# Allegro board sophum_esc_v3.brd
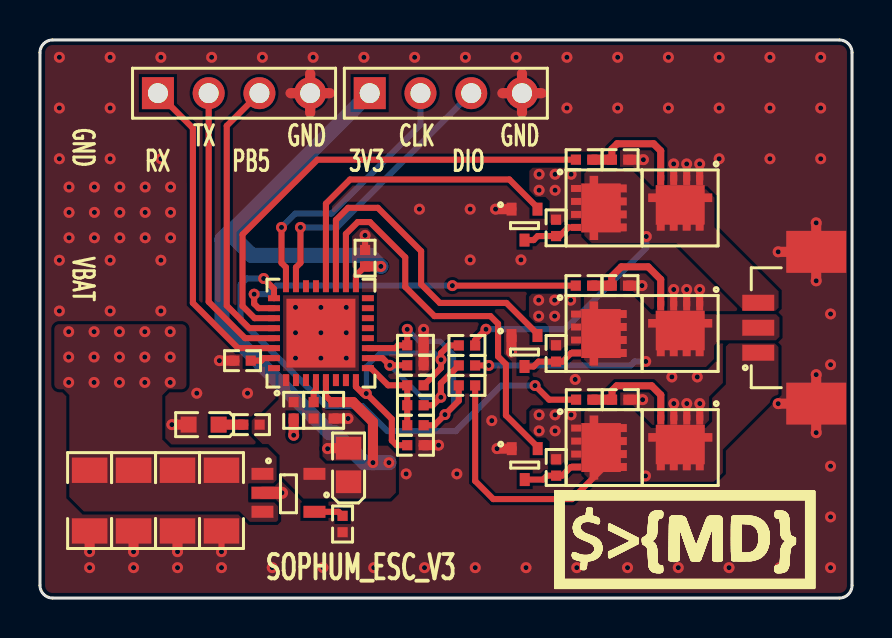
[diagram p0: board, top side]
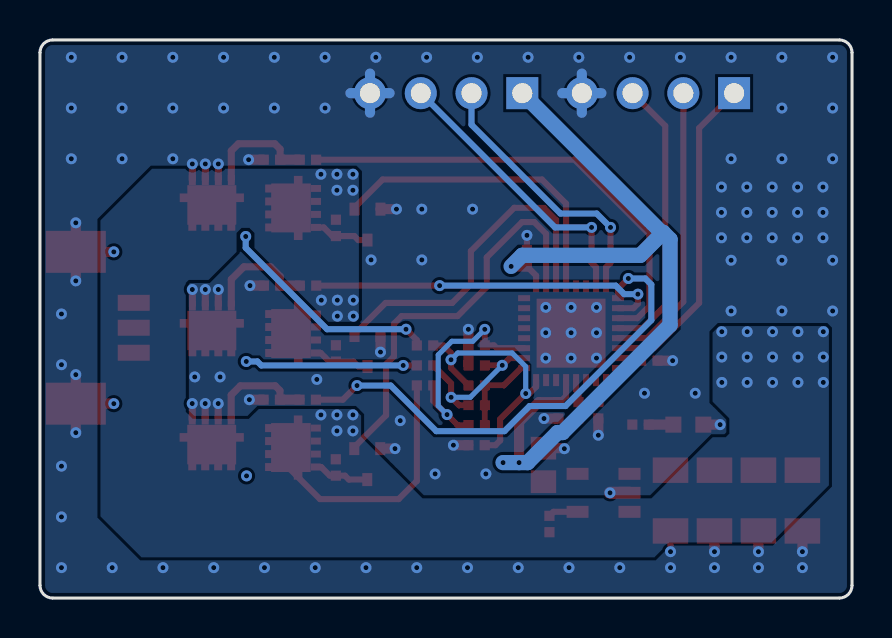
[diagram p1: board, bottom side, seen from below]

Outline 40.64 x 27.94 mm; copper layers: TOP, BOTTOM. Coordinates in mm from the lower left corner of the outline.
Outline path: 0,27.3 0,0.63 arc(0.19,0.19) 0.64,0 40,0 arc(40.45,0.19) 40.64,0.63 40.64,27.3 arc(40.45,27.75) 40,27.94 0.64,27.94 arc(0.19,27.75) 0,27.3

## Placement (name value [footprint] x y rotation side)
C1  47uF  [C1206]  4.68 4.88 270 top
C2  47uF  [C1206]  9.08 4.88 270 top
C3  47uF  [C1206]  2.48 4.88 270 top
C4  47uF  [C1206]  6.88 4.88 270 top
C5  1nF  [C0402]  15.14 3.71 270 top
C6  22uF  [TC0805]  15.44 6.66 90 top
C7  0.1uF  [C0402]  12.7 9.4 270 top
C8  0.1uF  [C0402]  14.7 9.4 270 top
C9  0.1uF  [C0402]  16.27 17.01 90 top
J1  COM  [HDR4X1-2R54-TM-VM]  5.9 25.28 0 top
J2  DEBUG  [HDR4X1-2R54-TM-VM]  16.5 25.28 0 top
J3  MOTOR_PLUG  [DBAR-3-1R25-SM]  37.4 13.53 90 top
LED1  RED  [LED0603]  8.19 8.68 180 top
Q1  AON7409  [DFN-3X3-5-0R50X0R35]  28.23 7.53 270 top
Q2  AON7409  [DFN-3X3-5-0R50X0R35]  28.23 13.24 270 top
Q3  AON7409  [DFN-3X3-5-0R50X0R35]  28.23 19.53 270 top
Q4  DTC143ZUAT106  [SOT-23-3-0R65X0R50]  24.26 6.71 180 top
Q5  DTC143ZUAT106  [SOT-23-3-0R65X0R50]  24.25 12.37 180 top
Q6  DTC143ZUAT106  [SOT-23-3-0R65X0R50]  24.25 18.69 180 top
Q7  AON7544  [DFN-3X3-5-0R50X0R35]  32.04 7.53 180 top
Q8  AON7544  [DFN-3X3-5-0R50X0R35]  32.04 13.24 180 top
Q9  AON7544  [DFN-3X3-5-0R50X0R35]  32.04 19.53 180 top
R1  10K  [R0402]  10.14 11.88 0 top
R2  1K  [R0402]  10.58 8.68 180 top
R3  10K  [R0402]  13.7 9.4 90 top
R4  2K  [R0402]  21.37 10.65 180 top
R5  2K  [R0402]  21.37 11.65 180 top
R6  2K  [R0402]  21.37 12.65 180 top
R7  1K  [R0402]  18.79 7.65 0 top
R8  1K  [R0402]  18.79 11.65 0 top
R9  1K  [R0402]  18.79 12.65 0 top
R10  10K  [R0402]  18.79 10.65 180 top
R11  10K  [R0402]  18.79 9.65 180 top
R12  10K  [R0402]  18.79 8.65 180 top
R13  75R  [R0402]  25.83 6.54 270 top
R14  75R  [R0402]  25.83 12.25 270 top
R15  75R  [R0402]  25.83 18.53 270 top
R16  75R  [R0402]  27.24 9.93 0 top
R17  75R  [R0402]  27.22 15.64 0 top
R18  75R  [R0402]  27.23 21.95 0 top
R19  10K  [R0402]  29.04 9.93 0 top
R20  10K  [R0402]  29.02 15.64 0 top
R21  10K  [R0402]  29.03 21.95 0 top
U1  AP2210K-3.3TRG1  [SOT-23-5-1R10X0R60]  12.44 5.27 0 top
U2  STM32F051K8U6  [UFQFPN-32-0R60X0R30]  14.06 13.26 90 top

## Library data of the parts
C1-C5 C7-C9 = CAPACITOR-NON-POL
C6 = CAPACITOR-POL
J1 J2 = HEADER-4X1
J3 = DBAR-3
LED1 = LED
Q1-Q3 = AON7409
Q4-Q6 = DTC143ZUAT106
Q7-Q9 = AON7544
R1-R21 = RESISTOR
U1 = AP2210K-3.3TRG1
U2 = STM32F051K8U6

## Footprints (pads in the part's own frame, mm; a bottom-side part is the same pattern mirrored in y, then rotated)
C0402
  rect 0.51x0.51 smd: 1(-0.41,0) 2(0.41,0)
C1206
  rect 1.27x1.78 smd: 1(-1.52,0) 2(1.52,0)
DBAR-3-1R25-SM
  rect 0.8x1.6 smd: 1(-1.25,1.45) 2(0,1.45) 3(1.25,1.45)
  rect 2.1x3 smd: 4(-3.8,-1.45) 5(3.8,-1.45)
DFN-3X3-5-0R50X0R35
  rect 0.35x0.5 smd: 1(-0.975,-1.4) 2(-0.325,-1.4) 3(0.325,-1.4) 4(0.975,-1.4)
  custom 3.21x2.28 smd: 5(0,0)
HDR4X1-2R54-TM-VM
  rect 1.6x1.6 hole 1: 1(0,0)
  round 1.6 hole 1: 2(2.54,0) 3(5.08,0) 4(7.62,0)
LED0603
  rect 0.8x0.8 smd: 1(-0.75,0) 2(0.75,0)
R0402
  rect 0.51x0.51 smd: 1(-0.41,0) 2(0.41,0)
SOT-23-3-0R65X0R50
  rect 0.5x0.65 smd: 1(0.65,-0.775) 2(-0.65,-0.775) 3(0,0.775)
SOT-23-5-1R10X0R60
  rect 1.1x0.6 smd: 1(-1.3,0.95) 2(-1.3,0) 3(-1.3,-0.95) 4(1.3,-0.95) 5(1.3,0.95)
TC0805
  rect 1.14x1.27 smd: 1(-0.84,0) 2(0.84,0)
UFQFPN-32-0R60X0R30
  rect 0.6x0.3 smd: 1(-2.35,1.75) 2(-2.35,1.25) 3(-2.35,0.75) 4(-2.35,0.25) 5(-2.35,-0.25) 6(-2.35,-0.75) 7(-2.35,-1.25) 8(-2.35,-1.75) 17(2.35,-1.75) 18(2.35,-1.25) 19(2.35,-0.75) 20(2.35,-0.25) 21(2.35,0.25) 22(2.35,0.75) 23(2.35,1.25) 24(2.35,1.75)
  rect 0.3x0.6 smd: 9(-1.75,-2.35) 10(-1.25,-2.35) 11(-0.75,-2.35) 12(-0.25,-2.35) 13(0.25,-2.35) 14(0.75,-2.35) 15(1.25,-2.35) 16(1.75,-2.35) 25(1.75,2.35) 26(1.25,2.35) 27(0.75,2.35) 28(0.25,2.35) 29(-0.25,2.35) 30(-0.75,2.35) 31(-1.25,2.35) 32(-1.75,2.35)
  rect 3.45x3.45 smd: 33(0,0)

## Nets
GND: C1.2 C2.2 C3.2 C4.2 C5.2 C6.2 C7.2 C8.2 C9.2 J1.4 J2.4 J3.4 J3.5 LED1.2 Q4.1(E) Q5.1(E) Q6.1(E) Q7.1(S#1) Q7.2(S#2) Q7.3(S#3) Q8.1(S#1) Q8.2(S#2) Q8.3(S#3) Q9.1(S#1) Q9.2(S#2) Q9.3(S#3) R1.1 R7.2 R8.2 R9.2 R19.2 R20.2 R21.2 U1.2(GND) U2.33(VSS)
VBAT: C1.1 C2.1 C3.1 C4.1 Q1.1(S#1) Q1.2(S#2) Q1.3(S#3) Q2.1(S#1) Q2.2(S#2) Q2.3(S#3) Q3.1(S#1) Q3.2(S#2) Q3.3(S#3) R13.1 R14.1 R15.1 U1.1(VIN) U1.3(EN)
VCC_3V3: C6.1 C7.1 C8.1 C9.1 J2.1 R2.1 R3.1 U1.5(VOUT) U2.1(VDD#1) U2.5(VDDA) U2.17(VDD#17)
ADC_MID: R10.2 R11.2 R12.2 U2.9(PA3)
ADC_U: R4.2 R9.1 R12.1 U2.11(PA5)
ADC_V: R5.2 R8.1 R11.1 U2.10(PA4)
ADC_W: R6.2 R7.1 R10.1 U2.8(PA2)
CTRL_U_DOWN: R16.1 U2.25(PA15)
CTRL_U_UP: Q4.2(B) U2.18(PA8)
CTRL_V_DOWN: R17.1 U2.26(PB3)
CTRL_V_UP: Q5.2(B) U2.19(PA9)
CTRL_W_DOWN: R18.1 U2.27(PB4)
CTRL_W_UP: Q6.2(B) U2.20(PA10)
OUT_U: J3.1 Q1.5(D) Q7.5(D) R4.1
OUT_V: J3.2 Q2.5(D) Q8.5(D) R5.1
OUT_W: J3.3 Q3.5(D) Q9.5(D) R6.1
PB5: J1.3 U2.28(PB5)
SWCLK: J2.2 U2.24(PA14)
SWDIO: J2.3 U2.23(PA13)
UART_RX: J1.1 U2.30(PB7)
UART_TX: J1.2 U2.29(PB6)
N14438: C5.1 U1.4(BYP/ADJ)
N14494: Q9.4(G) R18.2 R21.1
N14612: Q3.4(G) Q6.3(C) R15.2
N14714: Q7.4(G) R16.2 R19.1
N14814: Q1.4(G) Q4.3(C) R13.2
N14938: Q8.4(G) R17.2 R20.1
N15060: Q2.4(G) Q5.3(C) R14.2
N15672: R3.2 U2.4(NRST)
N23042: R1.2 U2.31(BOOT0)
N25846: LED1.1 R2.2

Pads without a net: U2 2 3 6 7 12 13 14 15 16 21 22 32

## Via types
v1: diameter 0.55, hole 0.254, TOP to BOTTOM, 176 vias

## Routing (per net, layer and track width the routed paths; a pad name or vN(x,y) marks a point on that pad's centre or on a via; arc(x,y) is an arc through that point)
GND: length 49.6
  TOP w0.305: C2.2 v1(9.08,2.32) ; C9.2 v1(16.27,18.16)
  TOP w0.356: Q8.1 v1(33.01,15.45) ; Q7.3 v1(31.72,9.74) ; Q8.2 v1(32.36,15.45) ; Q7.2 v1(32.37,9.74) ; Q9.3 v1(31.71,21.73) ; Q9.1 v1(33.01,21.73) ; Q7.1 v1(33.02,9.74) ; Q9.2 v1(32.36,21.73) ; Q8.3 v1(31.71,15.45)
  TOP w0.508: R19.2 v1(30.16,9.93) ; R7.2 v1(19.95,7.65) ; R20.2 v1(30.13,15.64) ; J1.4 13.52,24.3 ; J1.4 14.5,25.28 ; J1.4 12.54,25.28 ; J1.4 13.52,26.25 ; C6.2 14.42,7.5 v1(14.4,7.48) ; J3.5 v1(38.85,18.78) ; J3.5 v1(36.94,17.33) ; J3.5 v1(38.85,15.88) ; Q6.1 v1(22.8,19.47) ; J3.4 v1(36.94,9.73) ; J3.4 v1(38.85,8.28) ; J3.4 v1(38.85,11.18) ; C8.2 v1(15.42,8.99) ; C3.2 v1(2.48,2.32) ; v1(19.2,13.45) R9.2 R8.2 ; C7.2 v1(12.7,8.15) ; LED1.2 v1(6.6,8.68) ; C4.2 v1(6.88,2.32) ; Q4.1 v1(22.87,7.48) ; Q5.1 v1(23.6,12.32) ; J2.4 24.12,26.25 ; J2.4 23.14,25.28 ; J2.4 24.12,24.3 ; J2.4 25.1,25.28 ; R1.1 v1(8.98,11.88) ; R21.2 v1(30.2,21.95) ; C1.2 v1(4.68,2.32)
  TOP w0.61: U1.2 v1(12.11,5.27)
  BOTTOM w0.508: J2.4 24.12,24.3 ; J2.4 25.1,25.28 ; J2.4 24.12,26.25 ; J2.4 23.14,25.28 ; 12.54,25.28 J1.4 ; J1.4 13.52,26.25 ; J1.4 13.52,24.3 ; J1.4 14.5,25.28
  vias: v1(0.97,27.07) v1(0.97,24.53) v1(0.97,21.99) v1(0.97,16.91) v1(0.97,14.37) v1(1.46,20.58) v1(1.46,19.31) v1(1.46,18.04) v1(2.48,1.52) v1(2.73,20.58) v1(2.73,19.31) v1(2.73,18.04) v1(3.51,27.07) v1(3.51,24.53) v1(3.51,21.99) v1(3.51,16.91) v1(3.51,14.37) v1(4,20.58) v1(4,19.31) v1(4,18.04) v1(4.68,1.52) v1(5.27,20.58) v1(5.27,19.31) v1(5.27,18.04) v1(6.05,27.07) v1(6.05,21.99) v1(6.05,16.91) v1(6.05,14.37) v1(6.54,20.58) v1(6.54,19.31) v1(6.54,18.04) v1(6.88,1.52) v1(7.85,10.25) v1(8.59,27.07) v1(9.08,1.52) v1(10.39,10.25) v1(11.13,27.07) v1(11.62,1.52) v1(12.79,14.55) v1(12.79,13.28) v1(12.79,12.01) v1(13.67,27.07) v1(14.06,14.55) v1(14.06,13.28) v1(14.06,12.01) v1(14.16,1.52) v1(15.33,14.55) v1(15.33,13.28) v1(15.33,12.01) v1(16.21,27.07) v1(16.7,1.52) v1(18.32,6.22) v1(18.75,27.07) v1(18.99,19.47) v1(19.24,1.52) v1(20.86,6.22) v1(21.29,27.07) v1(21.53,19.47) v1(21.53,16.93) v1(21.78,1.52) v1(22.61,8.88) v1(23.83,27.07) v1(24.07,16.93) v1(24.32,1.52) v1(26.37,27.07) v1(26.37,24.53) v1(26.79,10.94) v1(26.86,1.52) v1(28.91,27.07) v1(28.91,24.53) v1(29.4,1.52) v1(31.45,27.07) v1(31.45,24.53) v1(31.63,11.07) v1(31.94,1.52) v1(32.9,11.07) v1(33.99,27.07) v1(33.99,24.53) v1(33.99,21.99) v1(34.48,1.52) v1(36.53,27.07) v1(36.53,24.53) v1(36.53,21.99) v1(37.02,1.52) v1(39.07,27.07) v1(39.07,24.53) v1(39.07,21.99) v1(39.56,14.22) v1(39.56,11.68) v1(39.56,6.6) v1(39.56,4.06) v1(39.56,1.52)
VBAT:
  vias: v1(1.44,13.34) v1(1.44,12.07) v1(1.44,10.79) v1(2.71,13.34) v1(2.71,12.07) v1(2.71,10.79) v1(3.98,13.34) v1(3.98,12.07) v1(3.98,10.79) v1(5.25,13.34) v1(5.25,12.07) v1(5.25,10.79) v1(6.52,13.34) v1(6.52,12.07) v1(6.52,10.79) v1(24.98,21.22) v1(24.98,20.42) v1(24.96,14.91) v1(24.96,14.11) v1(24.98,9.17) v1(24.98,8.37) v1(25.78,21.22) v1(25.78,20.42) v1(25.76,14.91) v1(25.76,14.11) v1(25.78,9.17) v1(25.78,8.37) v1(26.58,21.22) v1(26.56,14.91) v1(26.58,9.17)
VCC_3V3: length 41.9
  TOP w0.305: U2.5 14.31,10.11 14.62,9.81 C8.1 ; C9.1 15.81,16.15 U2.17
  TOP w0.508: v1(16.66,6.78) 16.66,8.81 15.67,9.81 C8.1 ; C9.1 v1(17.06,16.6)
  BOTTOM w0.762: v1(17.06,16.6) 16.51,17.16 10.6,17.16 9.45,18.3 ; J2.1 9.53,18.3 9.45,18.3 ; 9.45,18.3 9.11,17.96 9.11,13.67 14.49,8.29 14.73,8.29 16.24,6.78 v1(16.66,6.78) v1(17.46,6.78)
ADC_MID: length 4.3
  TOP w0.305: R12.2 R11.2 R10.2 17.42,10.65 16.56,11.51 U2.9
ADC_U: length 11.9
  TOP w0.305: U2.11 17.78,12.51 17.92,12.65 R9.1 v1(18.38,13.45) ; R4.2 20.96,9.88 v1(20.27,9.18) 19.74,8.65 R12.1
  BOTTOM w0.254: v1(20.27,9.18) 20.71,9.62 20.71,12.17 20.03,12.85 18.98,12.85 v1(18.38,13.45)
ADC_V: length 8.3
  TOP w0.305: R8.1 v1(17.5,11.65) 17.14,12.01 U2.10 ; R11.1 19.66,9.65 v1(20.06,10.05) 20.06,10.75 R5.2
  BOTTOM w0.254: v1(20.06,10.05) 19.11,10.05 v1(17.5,11.65)
ADC_W: length 13.3
  TOP w0.305: R10.1 20.07,11.52 v1(20.07,11.93) 20.07,12.26 20.45,12.65 R6.2 ; R7.1 17.85,7.65 17.61,7.89 17.61,8.96 v1(16.33,10.24) 16.15,10.24 15.81,10.58 U2.8
  BOTTOM w0.254: v1(20.07,11.93) 19.73,12.27 17.01,12.27 16.33,11.59 v1(16.33,10.24)
CTRL_U_DOWN: length 24.6
  TOP w0.305: U2.25 11.71,15.48 v1(11.19,16) ; v1(24.77,10.64) 25.48,9.93 R16.1
  BOTTOM w0.305: v1(11.19,16) 10.35,16 10.04,15.69 10.04,13.91 14.34,9.61 16.14,9.61 17.39,8.36 20.8,8.36 23.09,10.64 v1(24.77,10.64)
CTRL_U_UP: length 20.5
  TOP w0.305: U2.18 15.31,18.23 15.9,18.82 16.51,18.82 18.28,17.06 18.28,15.58 19.74,14.12 22.54,14.12 22.93,13.73 22.93,12.09 23.32,11.7 23.32,9.15 24.91,7.56 Q4.2
CTRL_V_DOWN: length 17.8
  TOP w0.305: v1(20.64,15.64) R17.1 ; v1(10.72,15.21) 10.72,14.73 10.94,14.51 U2.26
  BOTTOM w0.305: v1(10.72,15.21) 11.4,15.21 11.83,15.64 v1(20.64,15.64)
CTRL_V_UP: length 17.3
  TOP w0.305: Q5.2 24.9,13.22 23.34,14.77 20.01,14.77 19.07,15.71 19.07,17.37 16.91,19.54 15.42,19.54 14.81,18.93 U2.19
CTRL_W_DOWN: length 23.6
  TOP w0.305: U2.27 10.74,14.01 10.14,14.62 10.14,18.2 13.88,21.95 R18.1
CTRL_W_UP: length 15.9
  TOP w0.305: U2.20 14.31,19.75 15.52,20.95 23.49,20.95 24.9,19.54 Q6.2
OUT_U: length 12.3
  TOP w0.305: R4.1 21.78,5.86 22.69,4.95 26.63,4.95 28.23,6.56
  vias: v1(30.3,6.12)
OUT_V: length 8.6
  TOP w0.305: R5.1 v1(22.46,11.65)
  BOTTOM w0.305: v1(22.46,11.65) 29.56,11.65 29.76,11.84 v1(30.31,11.84)
OUT_W: length 11.3
  TOP w0.305: R6.1 21.78,12.92 v1(22.32,13.46)
  BOTTOM w0.305: v1(30.34,18.1) 30.34,17.53 26.27,13.46 v1(22.32,13.46)
PB5: length 14.1
  TOP w0.305: J1.3 9.35,23.64 9.35,14.64 10.48,13.51 U2.28
SWCLK: length 13.7
  TOP w0.305: U2.24 12.31,16.55 12.09,16.78 v1(12.09,18.56)
  BOTTOM w0.305: J2.2 19.04,23.7 14.59,19.25 12.78,19.25 v1(12.09,18.56)
SWDIO: length 14.4
  TOP w0.305: v1(13.04,18.56) 13.04,16.78 12.81,16.55 U2.23
  BOTTOM w0.305: v1(13.04,18.56) 14.86,18.56 J2.3
UART_RX: length 16.2
  TOP w0.305: J1.1 7.65,23.53 7.65,14.77 9.91,12.51 U2.30
UART_TX: length 14.5
  TOP w0.305: U2.29 10.26,13.01 8.44,14.83 J1.2
N14438: length 1.5
  TOP w0.305: U1.4 14.94,4.32 C5.1
N14494: length 5.7
  TOP w0.356: R21.1 28.62,22.48 28.89,22.74 30.71,22.74 31.06,22.39 Q9.4
  TOP w0.508: R18.2 R21.1
N14612: length 2.8
  TOP w0.305: Q6.3 24.7,17.92 24.9,18.12 R15.2 26.01,18.12 26.44,18.55 Q3.4
N14714: length 5.4
  TOP w0.356: R19.1 28.63,10.39 28.87,10.62 30.61,10.62 31.07,10.16 Q7.4
  TOP w0.508: R16.2 R19.1
N14814: length 2.8
  TOP w0.305: Q1.4 26.56,6.56 26.13,6.13 R13.2 25.38,6.13 25.18,5.93 Q4.3
N14938: length 5.7
  TOP w0.356: Q8.4 31.06,15.95 30.44,16.58 29.1,16.58 28.61,16.1 R20.1
  TOP w0.508: R17.2 R20.1
N15060: length 2.9
  TOP w0.305: Q5.3 24.7,11.59 24.95,11.84 R14.2 26.15,11.84 26.59,12.27 Q2.4
N15672: length 1.2
  TOP w0.305: U2.4 13.81,10.41 13.7,10.29 R3.2
N23042: length 1.2
  TOP w0.305: R1.2 11.08,11.88 11.21,12.01 U2.31
N25846: length 1.2
  TOP w0.508: LED1.1 R2.2

## Copper pours and planes (outline as drawn; the poured copper is in the pictures)
GND on TOP: 0.64,0.26 0.37,0.37 0.26,0.63 0.26,27.3 0.37,27.57 0.64,27.68 40,27.68 40.27,27.57 40.38,27.3 40.38,0.63 40.27,0.37 40,0.26 ; 5 cut-outs
GND on TOP: 0.72,17.95 0.79,17.77 0.97,17.69 7.08,17.69 7.26,17.77 7.33,17.95 7.33,20.7 7.26,20.88 7.08,20.95 0.97,20.95 0.79,20.88 0.72,20.7
GND on BOTTOM: 0.64,0.26 0.37,0.37 0.26,0.63 0.26,27.3 0.37,27.57 0.64,27.68 40,27.68 40.27,27.57 40.38,27.3 40.38,0.63 40.27,0.37 40,0.26 ; 2 cut-outs
VBAT on TOP: 27.07,12.71 26.99,12.64 26.28,12.64 26.03,12.39 25.6,12.39 25.48,12.5 25.48,13.57 25.28,13.78 24.8,13.78 24.47,14.11 24.47,15.08 24.63,15.24 26.07,15.24 26.07,15.24 26.88,15.24 27.07,15.05
VBAT on TOP: 27.09,6.97 27.01,6.89 26.3,6.89 26.05,6.64 25.62,6.64 25.5,6.76 25.5,7.83 25.3,8.03 24.82,8.03 24.49,8.36 24.49,9.34 24.65,9.5 26.09,9.5 26.09,9.49 26.9,9.49 27.09,9.31
VBAT on TOP: 27.09,19.02 27.01,18.94 26.3,18.94 26.05,18.69 25.62,18.69 25.5,18.81 25.5,19.87 25.3,20.08 24.82,20.08 24.49,20.41 24.49,21.39 24.65,21.54 26.09,21.54 26.9,21.54 27.09,21.35
VBAT on TOP: 10.51,3.81 9.99,4.33 2.2,4.33 1.47,5.06 1.47,10.16 1.18,10.45 0.97,10.45 0.79,10.53 0.72,10.71 0.72,13.46 0.79,13.64 0.97,13.71 7.08,13.71 7.26,13.64 7.33,13.46 7.33,10.71 7.26,10.53 7.08,10.45 6.42,10.45 6.12,10.15 6.12,7.93 6.12,7.93 6.52,7.54 11.38,7.54 11.84,7.07 11.84,5.91 11.67,5.74 10.45,5.74 10.42,5.71 10.42,4.82 10.45,4.79 11.73,4.79 11.92,4.59 11.92,3.9 11.83,3.81
VBAT on BOTTOM: 6.98,9.83 6.14,8.99 6.14,8.23 6.32,8.05 6.98,8.05 10.04,4.99 21.49,4.99 24.57,8.07 24.57,9.14 24.9,9.47 29.69,9.47 30.19,8.97 32.99,8.97 33.34,9.32 33.34,15.78 33.19,15.93 32.2,15.93 30.8,17.32 30.8,18.27 30.54,18.53 30.16,18.53 29.91,18.28 29.91,17.52 26.22,13.83 24.83,13.83 24.68,13.98 24.68,21.31 24.87,21.49 35.03,21.49 37.61,18.91 37.61,4.09 35.56,2.04 9.89,2.04 9.15,2.78 4.02,2.78 1.16,5.64 1.16,13.47 1.3,13.62 6.65,13.62 6.98,13.29
VCC_3V3 on TOP: 17.81,5.28 17.81,7.22 17.4,7.63 16.55,7.63 16.41,7.48 16.41,6.9 16.23,6.73 14.38,6.73 14.37,6.72 14.3,6.72 13.99,7.03 13.99,9.32 13.92,9.39 13.25,9.39 13.22,9.43 13.22,9.9 12.82,10.29 12.65,10.29 12.5,10.43 12.5,11.17 12.47,11.21 11.97,11.21 11.94,11.17 11.94,9.93 11.14,9.14 10.85,9.14 10.6,8.89 10.6,8.25 11.14,7.71 11.43,7.71 11.99,7.15 11.99,6.17 13.19,4.98 17.52,4.98
OUT_U on TOP: 27.62,5.82 27.24,6.2 27.24,9.31 27.43,9.49 29.61,9.49 30.58,8.52 33.32,8.52 33.64,8.84 33.64,10.01 34.33,10.7 34.33,12.59 34.48,12.75 36.78,12.75 36.96,12.57 36.96,10.22 34.17,7.44 34.17,6.27 33.72,5.82
OUT_V on TOP: 33.74,12.64 33.74,11.97 33.33,11.57 27.6,11.57 27.22,11.94 27.22,15.05 27.41,15.24 29.59,15.24 30.61,14.21 36.83,14.21 37.01,14.03 37.01,13.08 36.83,12.9 34,12.9
OUT_W on TOP: 33.34,20.46 33.76,20.04 33.76,18.56 36.97,15.35 36.97,14.54 36.81,14.38 35.24,14.38 31.85,17.77 27.62,17.77 27.24,18.14 27.24,21.25 27.43,21.44 29.61,21.44 30.58,20.46

## Text on the board
Ref Des/Silkscreen Top: RX | TX | PB5 | GND | 3V3 | CLK | DIO | VBAT | SOPHUM_ESC_V3
NCLEGEND-1-2: FIGURE | SIZE | 10.0 | 39.37 | DRILL CHART: TOP to BOTTOM | ALL UNITS ARE IN MILS | PLATED | QTY | 176 | 8
